# Altium PCB PCB1.PcbDoc
Units mm, origin at the board's own origin, x right, y up, seen from the top; angles counter-clockwise.
Board outline 47.79 x 53 mm, 2 copper layers (Top Layer, Bottom Layer); 25 components, 37 nets, 113 pads, 4 vias.
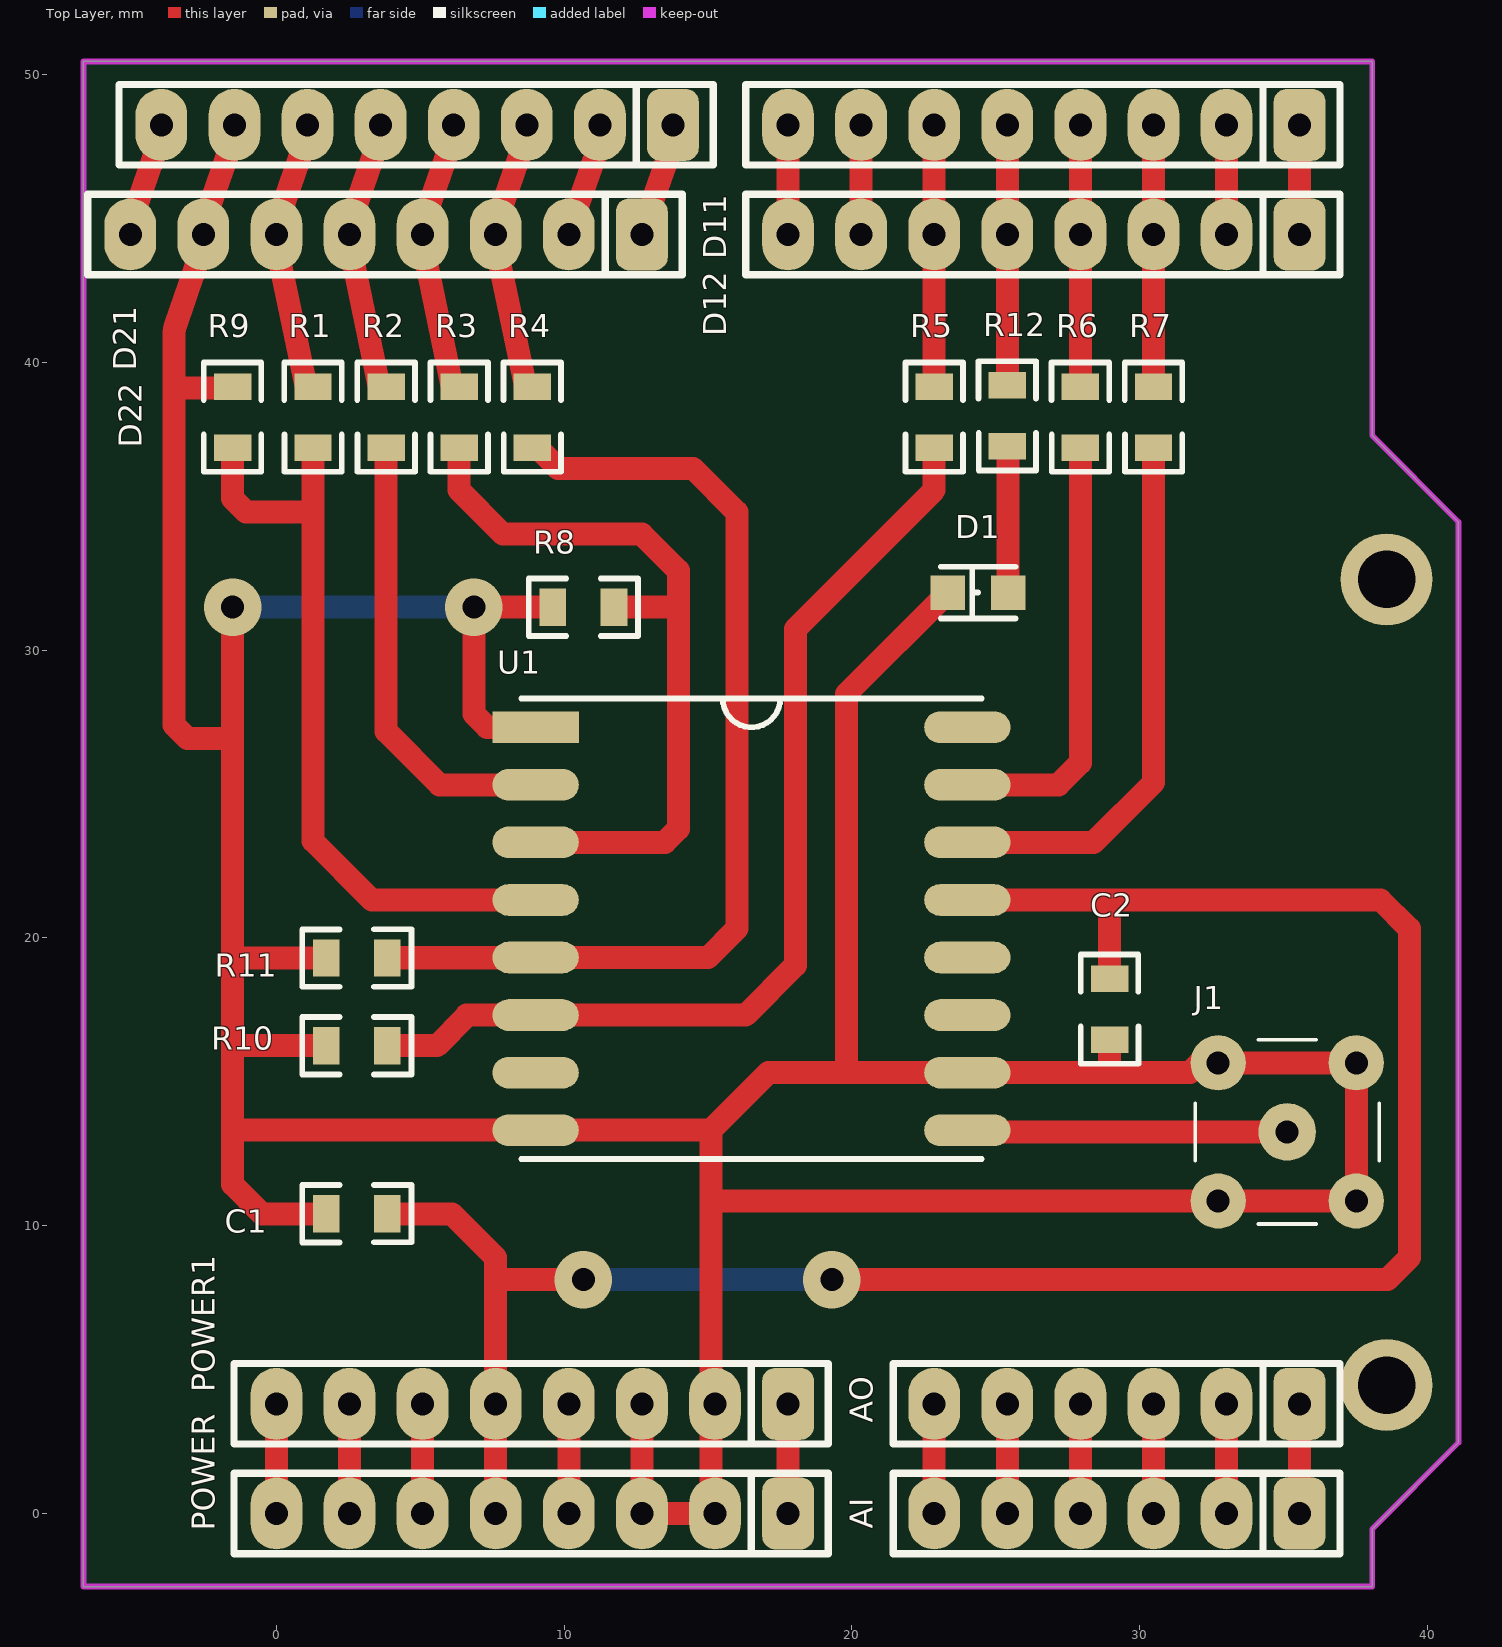
[diagram p0: Top Layer view]
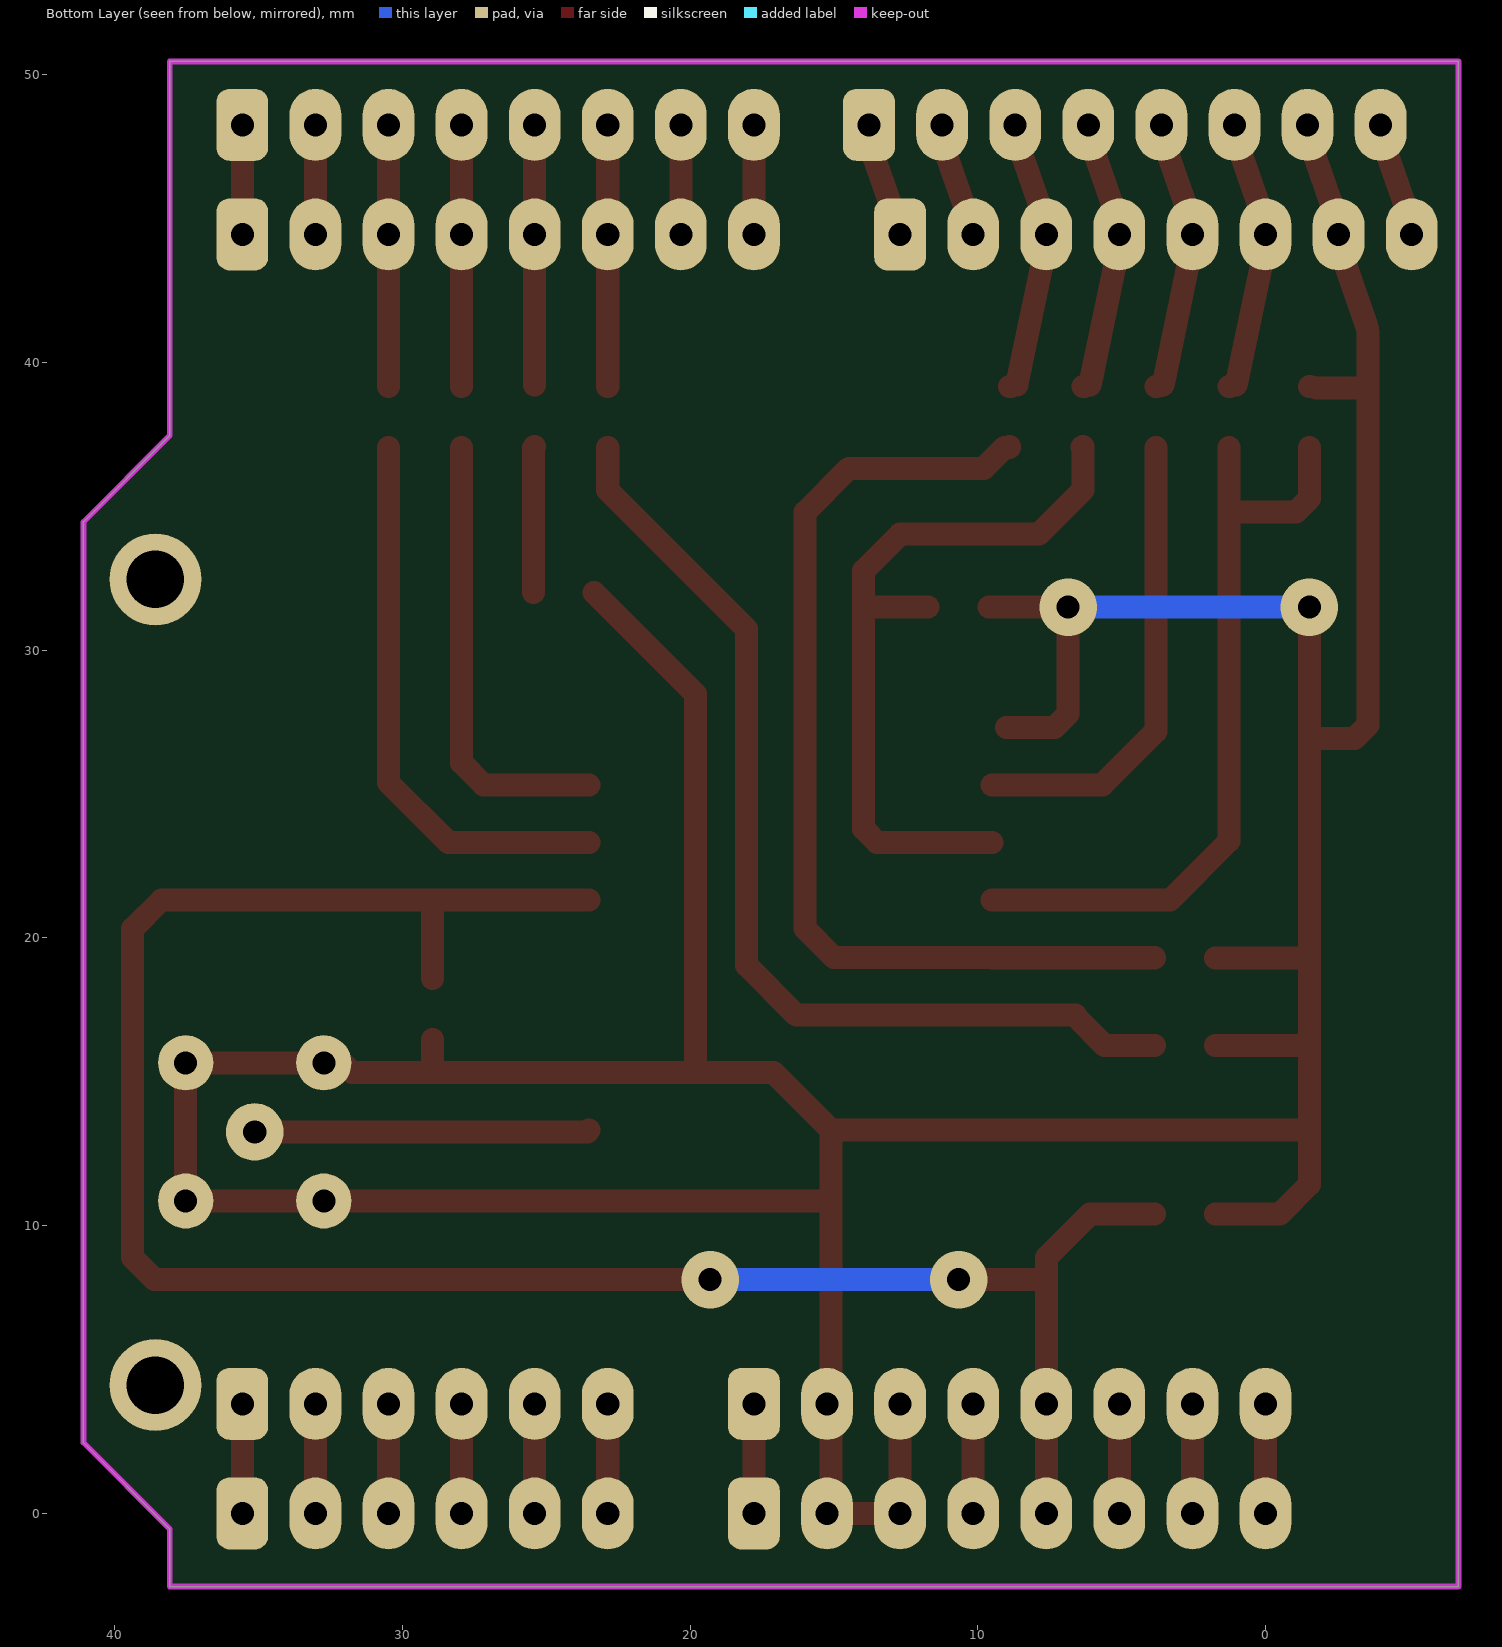
[diagram p1: Bottom Layer view, seen from below]
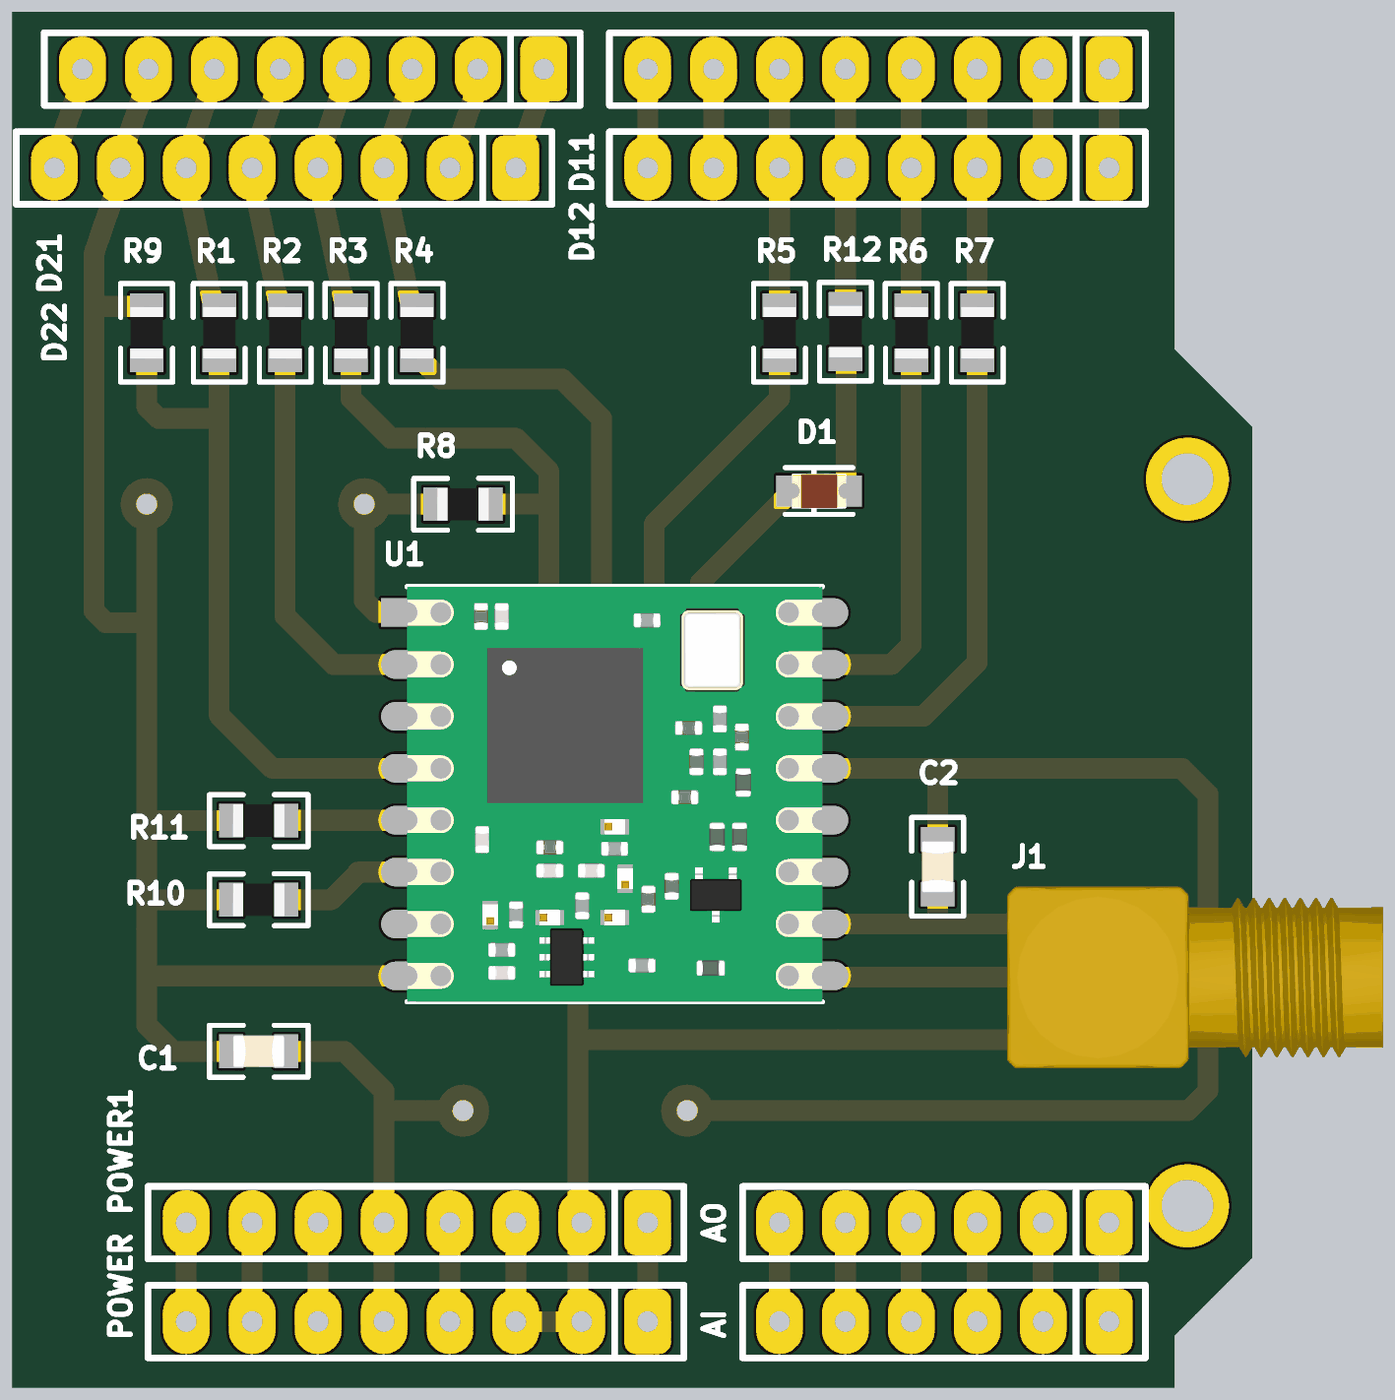
[diagram p2: 3D render of the assembled board from above, using the file's embedded part models]

## Layer stack, top to bottom
Top Solder: solder mask 0.0102, Solder Resist, Dk 3.5
Top Layer: signal copper 0.0356
Dielectric 1: dielectric 0.32, FR-4, Dk 4.8
Bottom Layer: signal copper 0.0356
Bottom Solder: solder mask 0.0102, Solder Resist, Dk 3.5

## Board outline
-6.706,-2.54 -6.706,50.46 38.08,50.46 38.08,37.46 41.08,34.46 41.08,2.46 38.08,-0.54 38.08,-2.54

## Design rules (kind name [scope] priority, off if disabled: settings)
Clearance [All] p1: gap=0.2 ignorepadtopadclearanceinfootprint=FALSE
PolygonConnect [All] p1: connectstyle=Relief reliefconductorwidth=0.254 reliefentries=4 polygonreliefangle="90 Angle" airgapwidth=0.254
RoutingVias [All] p1: holewidth=0.711 width=1.27 viastyle="Through Hole" minholewidth=0.711 minwidth=1.27 maxholewidth=0.711 maxwidth=1.27
SolderMaskExpansion [All] p1: expansion=0.102 istentingtop=FALSE
Width [All] p1: maxlimit=10 minlimit=0.2 preferedwidth=0.5
30 further rules are at their usual default settings.

## Components (designator, comment, footprint, x,y, rotation, side; value= is the part's Value field where it differs from the comment)
AI "Header 6" PH-1X6 35.56,0 r180 top
AO "Header 6" PH-1X6 35.56,3.81 r180 top
C1 "100nF" C-0805 2.794,10.414 r180 top
C2 "100nF" C-0805 28.956,17.526 r270 top
D1 "LED" LED-0805 24.384,32.004 r180 top
D11 "8" PH-1X8 35.56,48.26 r180 top
D12 "8" PH-1X8 35.56,44.45 r180 top
D21 "8" PH-1X8 13.78,48.26 r180 top
D22 "8" PH-1X8 12.7,44.45 r180 top
J1 "SMA" SMA-CONNECTOR-R 35.128,13.259 r90 top
POWER "8" PH-1X8 17.78,0 r180 top
POWER1 "8" PH-1X8 17.78,3.81 r180 top
R1 "RES" R-0805 1.27,38.1 r90 top
R2 "RES" R-0805 3.81,38.1 r90 top
R3 "RES" R-0805 6.35,38.1 r90 top
R4 "RES" R-0805 8.89,38.1 r90 top
R5 "RES" R-0805 22.86,38.1 r90 top
R6 "RES" R-0805 27.94,38.1 r90 top
R7 "RES" R-0805 30.48,38.1 r90 top
R8 "RES" R-0805 10.668,31.496 r0 top
R9 "RES" R-0805 -1.524,38.1 r270 top
R10 "RES" R-0805 2.794,16.256 r0 top
R11 "RES" R-0805 2.794,19.304 r0 top
R12 "RES" R-0805 25.4,38.146 r90 top
U1 "RFM95W-868S2" RFM95 16.51,20.32 r0 top

## Footprints (in the part's own frame and the unit in brackets; to place one, negate y for a bottom-side part, rotate by r counter-clockwise, add the part's x,y. Pads: shape width x height; smd on the part's side, far side on the other; paste and mask are expansions set on the pad)
C-0805 [mm] "Multilayer Chip Capacitors - General"
  rect 0.925x1.3 smd: 1(-1.062,0) 2(1.062,0)
  silkscreen extent -1.9,-1 1.9,1, body extent -1,-0.63 1,0.62, height 0.81
LED-0805 [mm]
  rect 1.2x1.2 smd: A(-1.05,0) K(1.05,0)
  silkscreen extent -1.3,-0.9 1.3,0.9, body extent -1.05,-0.67 1.05,0.68, height 0.93
PH-1X6 [mm] "2.54mm"
  rrect50% 1.8x2.5 hole 0.8: 1(0,0)
  oval 1.8x2.5 hole 0.8 mask+0.102: 2(2.54,0) 3(5.08,0) 4(7.62,0) 5(10.16,0) 6(12.7,0)
  silkscreen extent -1.4,-1.4 14.12,1.4
PH-1X8 [mm] "2.54mm"
  rrect50% 1.8x2.5 hole 0.8: 1(0,0)
  oval 1.8x2.5 hole 0.8 mask+0.102: 2(2.54,0) 3(5.08,0) 4(7.62,0) 5(10.16,0) 6(12.7,0) 7(15.24,0) 8(17.78,0)
  silkscreen extent -1.4,-1.4 19.25,1.4
R-0805 [mm]
  rect 0.925x1.3 smd: 1(-1.062,0) 2(1.062,0)
  silkscreen extent -1.9,-1 1.9,1, body extent -1,-0.63 1,0.62, height 0.5
RFM95 [mm]
  rect 3x1.1 smd: 1(-7.5,7)
  oval 3x1.1 smd: 2(-7.5,5) 3(-7.5,3) 4(-7.5,1) 5(-7.5,-1) 6(-7.5,-3) 7(-7.5,-5) 8(-7.5,-7) 9(7.5,-7) 10(7.5,-5) 11(7.5,-3) 12(7.5,-1) 13(7.5,1) 14(7.5,3) 15(7.5,5) 16(7.5,7)
  silkscreen extent -8,-8 8,8, body extent -8,-8 8,8, height 2.04
SMA-CONNECTOR-R [mm]
  round 2 hole 0.8: 1(0,0)
  round 1.92 hole 0.8: 2(-2.4,-2.4) 2(-2.4,2.4) 2(2.4,-2.4) 2(2.4,2.4)
  silkscreen extent -3.2,-3.2 3.2,3.2, body extent -3.5,-11 3.5,3.5, height 11.8

## Part data
AI AO: library part PH-1X6, "PIN HEADER 1x6 2.56mm"
C1 C2: library part CAP, "CAPACITOR BIPOLAR"
D11 D12 D21 D22 POWER POWER1: library part PH-1X8, "PIN HEADER 1x8 2.56mm"
J1: library part SMA-CONNECTOR, "Straight SMA Connector", Package=None, Availability=Unavailable, MP=altium_native_batch, Price=None
U1: "Transceiver RF 868 MHz (+20/-139dBm), FSK, GFSK, MSK, GMSK, LoRaTM, OOK, 16 x 16 mm", Case/Package=SMD/SMT, Current - Receiving=12.1mA, Current - Transmitting=120mA, Frequency=868MHz, Manufacturer="RF Solutions", Max Operating Temperature=70°C, Min Operating Temperature=-20°C, Supplier Part Number 1=223-RFM95W-868S2, Category="RF Receivers, Transceivers", ComponentLink1Description=https://www.rfsolutions.co.uk/downloads/1463993415RFM95_96_97_98W.pdf?src-supplier=Digikey, ComponentLink1URL=https://www.rfsolutions.co.uk/downloads/1463993415RFM95_96_97_98W.pdf?src-supplier=Digikey, Data Rate=300Kbps, Interface=SPI, Manufacturer Part Number=RFM95W-868S2, Mount="Surface Mount", Packaging=Bulk, Pricing 1="1=22/49, 10=20/77, 50=18/46, 100=17/59, 1000=15/57, 10000=15/57 (USD)", RoHS=Yes, Sensitivity=-123dBm, Stock 1=200, Supplier 1=Mouser

## Free pads (board coordinates)
  round 3.2 hole 2 unplated: 0(38.58,4.46) 0(38.58,32.46)

## Via types
v1: diameter 2, hole 0.8, Top Layer to Bottom Layer, 4 vias

## Nets (pads, with @x,y where several pads share a name; then routed paths per layer and width w, separated by ;. In a path a pad name is that pad's centre, name@x,y a point inside that pad or via, vN(x,y) a via of type N, cw(c..) or ccw(c..) an arc to the next point about the centre after c; other vN are vias at no path point)
DIO0: R7.1 U1.14 | length 19.5
  Top Layer w0.8: U1.14@23.51,23.32 28.4,23.32 30.48,25.4 R7.1
DIO1: R6.1 U1.15 | length 15.7
  Top Layer w0.8: U1.15@23.51,25.32 27.178,25.32 27.94,26.082 R6.1
GND: C1.2 C2.2 D1.K D21.7 D22.7 J1.2 POWER1.2 POWER1.3 POWER.2 POWER.3 R8.1 R9.1 R10.1 R11.1 U1.1 U1.8 U1.10 | length 178.4
  Top Layer w0.8: v1(-1.524,31.496) -1.524,26.924 ; R9.1 -1.774,39.116 -3.556,39.116 ; D21.7@-1.365,48.165 D21.7 -1.46,47.91 -2.54,44.8 D22.7 -2.54,44.1 -3.512,41.289 ccw(c-2.756,41.028) -3.556,41.028 -3.556,39.116 ; C1.2 -0.508,10.414 -1.524,11.43 -1.524,13.432 ; R10.1 -1.27,16.256 -1.524,16.51 ; R11.1 -1.524,19.304 ; U1.1 7.327,27.32 6.858,27.789 v1(6.858,31.496) R8.1 ; POWER1.3 POWER.3 POWER.2 15.098,0.142 POWER1.2@15.098,3.81 ; 15.098,10.693 15.269,10.864 J1.2@32.088,10.864 ; POWER1.2 POWER1.2@15.098,3.81 ; D1.K 19.812,28.482 19.812,15.32 ; C2.2 28.956,15.32 ; J1.2@32.088,15.664 31.898,15.474 31.744,15.32 30.732,15.32 28.956,15.32 ; J1.2@32.728,10.859 37.528,10.859 37.528,15.659 J1.2@32.728,15.659 ; -3.556,39.116 -3.556,27.393 -3.087,26.924 -1.524,26.924 ; -1.524,13.432 -1.412,13.32 U1.8 15.098,13.32 ; -1.524,13.432 -1.524,16.51 ; -1.524,16.51 -1.524,19.304 ; -1.524,19.304 -1.524,26.924 ; POWER1.2@15.098,3.81 15.098,13.32 ; 15.098,13.32 17.098,15.32 19.812,15.32 ; 19.812,15.32 U1.10 28.956,15.32
  Bottom Layer w0.8: v1(-1.524,31.496) v1(6.858,31.496)
MISO: D21.5 D22.5 R2.2 | length 9.7
  Top Layer w0.8: D21.5@3.715,48.165 D21.5 3.62,47.91 2.54,44.8 D22.5 2.54,44.1 3.56,39.225 3.64,39.205 3.767,39.173 R2.2 R2.2@3.778,39.162
MOSI: D21.4 D22.4 R3.2 | length 9.7
  Top Layer w0.8: D21.4@6.255,48.165 D21.4 6.16,47.91 5.08,44.8 D22.4 5.08,44.1 6.1,39.225 6.18,39.205 6.307,39.173 R3.2 R3.2@6.318,39.162
NetAI_1: AI.1 AO.1 | length 3.8
  Top Layer w0.8: AI.1 AO.1
NetAI_2: AI.2 AO.2 | length 3.8
  Top Layer w0.8: AI.2 AO.2
NetAI_3: AI.3 AO.3 | length 3.8
  Top Layer w0.8: AI.3 AO.3
NetAI_4: AI.4 AO.4 | length 3.8
  Top Layer w0.8: AI.4 AO.4
NetAI_5: AI.5 AO.5 | length 3.8
  Top Layer w0.8: AI.5 AO.5
NetAI_6: AI.6 AO.6 | length 3.8
  Top Layer w0.8: AI.6 AO.6
NetAnt_1: J1.1 U1.9 | length 11.6
  Top Layer w0.8: U1.9@23.51,13.32 23.566,13.264 J1.1@35.128,13.264
NetD1_A: D1.A R12.1 | length 5.1
  Top Layer w0.8: R12.1 25.433,37.021 25.433,32.204 D1.A
NetD11_1: D11.1 D12.1 | length 3.8
  Top Layer w0.8: D12.1 D11.1
NetD11_2: D11.2 D12.2 | length 3.8
  Top Layer w0.8: D12.2 D11.2
NetD11_3: D11.3 D12.3 R7.2 | length 9.1
  Top Layer w0.8: R7.2 D12.3 D11.3
NetD11_4: D11.4 D12.4 R6.2 | length 9.1
  Top Layer w0.8: R6.2 D12.4 D11.4
NetD11_5: D11.5 D12.5 R12.2 | length 9.1
  Top Layer w0.8: R12.2 D12.5 D11.5
NetD11_6: D11.6 D12.6 R5.2 | length 9.1
  Top Layer w0.8: R5.2 D12.6 D11.6
NetD11_7: D11.7 D12.7 | length 3.8
  Top Layer w0.8: D12.7 D11.7
NetD11_8: D11.8 D12.8 | length 3.8
  Top Layer w0.8: D12.8 D11.8
NetD21_1: D21.1 D22.1 | length 3.8
  Top Layer w0.8: D22.1@12.7,44.55 D21.1@13.97,48.16
NetD21_2: D21.2 D22.2 | length 4
  Top Layer w0.8: D22.2 10.16,44.55 11.43,48.16 D21.2@11.43,48.26
NetD21_8: D21.8 D22.8 | length 4.1
  Top Layer w0.8: D22.8 -5.08,44.8 -4,47.91 D21.8 D21.8@-3.905,48.165
NetPOWER1_1: POWER1.1 POWER.1 | length 3.8
  Top Layer w0.8: POWER.1 POWER1.1
NetPOWER1_4: POWER1.4 POWER.4 | length 3.8
  Top Layer w0.8: POWER.4 POWER1.4
NetPOWER1_6: POWER1.6 POWER.6 | length 3.8
  Top Layer w0.8: POWER.6 POWER1.6
NetPOWER1_7: POWER1.7 POWER.7 | length 3.8
  Top Layer w0.8: POWER.7 POWER1.7
NetPOWER1_8: POWER1.8 POWER.8 | length 3.8
  Top Layer w0.8: POWER.8 POWER1.8
NetR1_1: R1.1 R9.2 U1.4 | length 27.5
  Top Layer w0.8: R9.2 -1.524,35.267 -1.055,34.798 1.27,34.798 ; R1.1 1.27,34.798 ; U1.4@9.51,21.32 3.318,21.32 1.27,23.368 1.27,34.798
NetR2_1: R2.1 U1.2 | length 16.3
  Top Layer w0.8: R2.1 3.81,27.178 5.668,25.32 U1.2@9.51,25.32
NetR3_1: R3.1 R8.2 U1.3 | length 26.2
  Top Layer w0.8: R3.1 6.35,35.56 7.874,34.036 12.7,34.036 13.97,32.766 13.97,31.496 ; R3.1@6.35,37.084 R3.1@6.373,37.061 ; U1.3@9.51,23.32 13.501,23.32 13.97,23.789 13.97,31.496 ; R8.2 13.97,31.496
NetR4_1: R4.1 R11.2 U1.5 | length 35.1
  Top Layer w0.8: R11.2 3.865,19.312 9.502,19.312 9.51,19.32 15.002,19.32 16.002,20.32 16.002,34.798 14.478,36.322 9.793,36.322 9.078,37.038 R4.1@8.936,37.038 ; R4.1 R4.1@8.936,37.038 ; R4.1@8.89,37.084 R4.1@8.936,37.038
RESET: R5.1 R10.2 U1.6 | length 35.3
  Top Layer w0.8: R10.2 5.588,16.256 6.604,17.272 6.604,17.32 9.51,17.32 16.304,17.32 18.034,19.05 18.034,30.734 22.86,35.56 R5.1
SCK: D21.6 D22.6 R1.2 | length 9.7
  Top Layer w0.8: D21.6@1.175,48.165 D21.6 1.08,47.91 0,44.8 D22.6 0,44.1 1.02,39.225 1.227,39.173 R1.2
SS: D21.3 D22.3 R4.2 | length 9.7
  Top Layer w0.8: D21.3@8.795,48.165 D21.3 8.7,47.91 7.62,44.8 D22.3 7.62,44.1 8.64,39.225 8.847,39.173 R4.2
VCC: C1.1 C2.1 POWER1.5 POWER.5 U1.13 | length 75.9
  Top Layer w0.8: C1.1 6.096,10.414 7.62,8.89 7.62,8.128 ; POWER.5 7.62,8.128 ; v1(10.668,8.128) 7.62,8.128 ; v1(19.304,8.128) 38.608,8.128 39.37,8.89 39.37,20.32 38.37,21.32 28.781,21.32 ; U1.13@23.51,21.32 28.781,21.32 ; C2.1 28.956,21.145 28.781,21.32
  Bottom Layer w0.8: v1(10.668,8.128) v1(19.304,8.128)
pads on no net: U1.7 U1.11 U1.12 U1.16

## Keep-outs
Keep-Out Layer:
  the board outline again, w0.2